# EAGLE board 00A-81-A1-01 (EAGLE 6.3), part 1 of 2
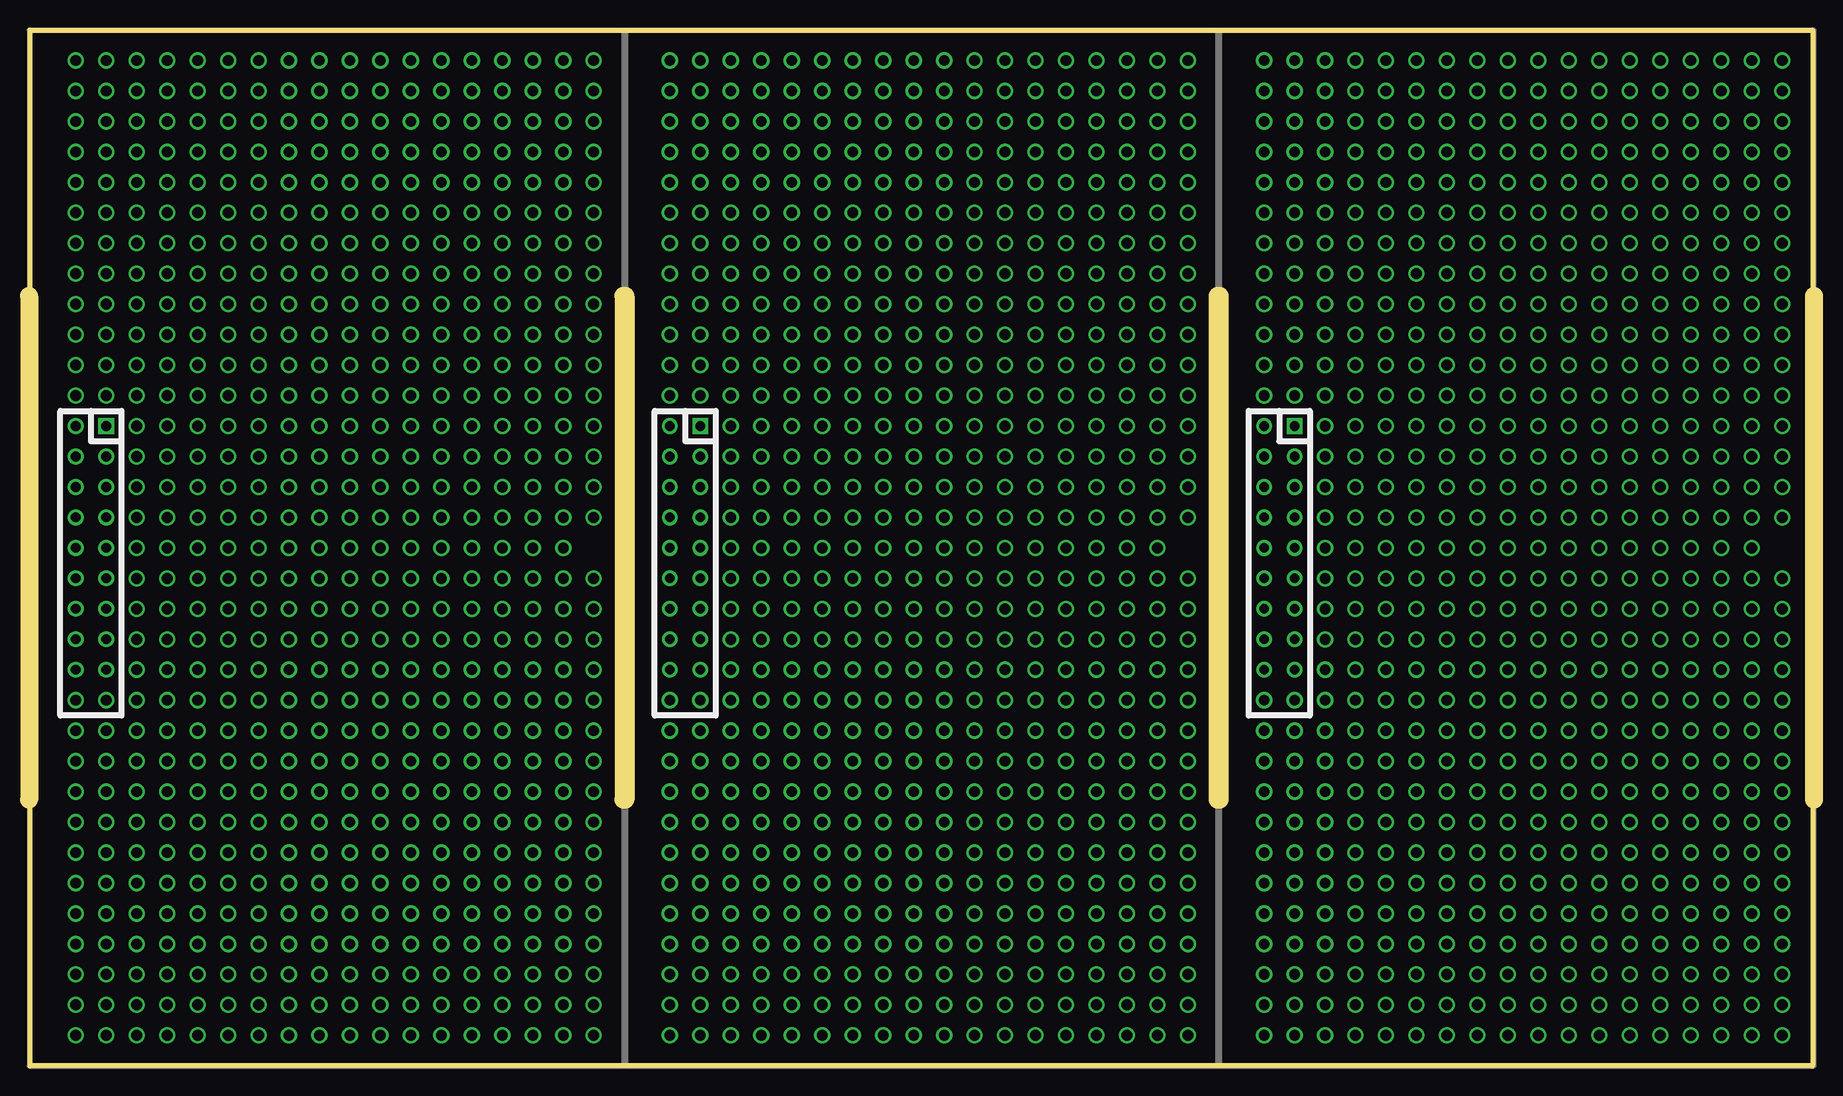
[diagram p0: board, top side]

Size 148.59 x 86.36 mm. Coordinates in mm from the lower left corner, seen from the top.
Outline: 0,86.36 148.59,86.36 148.59,0 0,0 0,86.36
Copper layers (1*16): Top 0.035mm / dielectric 1.5mm / Bottom 0.035mm
Design rules "default": minimum track width 10mil, minimum drill 0.6mm, track to track 8mil, track to pad 8mil, pad to pad 8mil, via to via 8mil, smd to smd 8mil, copper to edge 40mil, drill to drill 8mil, minimum pad ring 10mil, minimum via ring 8mil, stop-mask expansion 4mil, vias tented up to drill 0mil, thermal gap 10mil

## Footprints (pad centres in the part's own frame; a part is rotated, then mirrored left to right if it is on the bottom)
BC_HOUSING_53MM = drill 0.8 square: 1 6.42,10.16 | drill 0.8: 2 3.88,10.16; 3 6.42,7.62; 4 3.88,7.62; 5 6.42,5.08; 6 3.88,5.08; 7 6.42,2.54; 8 3.88,2.54; 9 6.42,0; 10 3.88,0; 11 6.42,-2.54; 12 3.88,-2.54; 13 6.42,-5.08; 14 3.88,-5.08; 15A 6.42,-7.62; 15B 3.88,-7.62; 16A 6.42,-10.16; 16B 3.88,-10.16

## Placement (x,y rotation side)
E$1  [IMAGE_GERBER_FRAME]  -21.59,-60.96 0 top  (outside the outline)
J1  [BC_HOUSING_53MM]  -0.07,43.18 0 top
J2  [BC_HOUSING_53MM]  49.46,43.18 0 top
J3  [BC_HOUSING_53MM]  98.99,43.18 0 top

## Library data of the parts
E$1 = miniPCB_ENGDWG; DWG_NO: 00A-81; REV: A1-01
J1-J3 = miniPCB_BOARDS

## Tracks (layer width: path | path; a pad name or v marks a point on that pad's centre or on a via)
N$1  (via drill 0.9)
  other vias: 3.81,55.88
N$2  (via drill 0.9)
  other vias: 6.35,55.88
N$3  (via drill 0.9)
  other vias: 6.35,58.42
N$4  (via drill 0.9)
  other vias: 3.81,58.42
N$5  (via drill 0.9)
  other vias: 3.81,60.96
N$6  (via drill 0.9)
  other vias: 6.35,60.96
N$7  (via drill 0.9)
  other vias: 3.81,63.5
N$8  (via drill 0.9)
  other vias: 6.35,63.5
N$9  (via drill 0.9)
  other vias: 3.81,66.04
N$10  (via drill 0.9)
  other vias: 6.35,66.04
N$11  (via drill 0.9)
  other vias: 3.81,68.58
N$12  (via drill 0.9)
  other vias: 6.35,68.58
N$13  (via drill 0.9)
  other vias: 3.81,71.12
N$14  (via drill 0.9)
  other vias: 6.35,71.12
N$15  (via drill 0.9)
  other vias: 3.81,73.66
N$16  (via drill 0.9)
  other vias: 6.35,73.66
N$17  (via drill 0.9)
  other vias: 3.81,76.2
N$18  (via drill 0.9)
  other vias: 6.35,76.2
N$19  (via drill 0.9)
  other vias: 3.81,78.74
N$20  (via drill 0.9)
  other vias: 6.35,78.74
N$21  (via drill 0.9)
  other vias: 3.81,81.28
N$22  (via drill 0.9)
  other vias: 6.35,81.28
N$23  (via drill 0.9)
  other vias: 3.81,83.82
N$24  (via drill 0.9)
  other vias: 6.35,83.82
N$25  (via drill 0.9)
  other vias: 3.81,2.54
N$26  (via drill 0.9)
  other vias: 6.35,2.54
N$27  (via drill 0.9)
  other vias: 6.35,5.08
N$28  (via drill 0.9)
  other vias: 3.81,5.08
N$29  (via drill 0.9)
  other vias: 3.81,7.62
N$30  (via drill 0.9)
  other vias: 6.35,7.62
N$31  (via drill 0.9)
  other vias: 3.81,10.16
N$32  (via drill 0.9)
  other vias: 6.35,10.16
N$33  (via drill 0.9)
  other vias: 3.81,12.7
N$34  (via drill 0.9)
  other vias: 6.35,12.7
N$35  (via drill 0.9)
  other vias: 3.81,15.24
N$36  (via drill 0.9)
  other vias: 6.35,15.24
N$37  (via drill 0.9)
  other vias: 3.81,17.78
N$38  (via drill 0.9)
  other vias: 6.35,17.78
N$39  (via drill 0.9)
  other vias: 3.81,20.32
N$40  (via drill 0.9)
  other vias: 6.35,20.32
N$41  (via drill 0.9)
  other vias: 3.81,22.86
N$42  (via drill 0.9)
  other vias: 6.35,22.86
N$43  (via drill 0.9)
  other vias: 3.81,25.4
N$44  (via drill 0.9)
  other vias: 6.35,25.4
N$45  (via drill 0.9)
  other vias: 3.81,27.94
N$46  (via drill 0.9)
  other vias: 6.35,27.94
N$47  (via drill 0.9)
  other vias: 3.81,30.48
N$48  (via drill 0.9)
  other vias: 6.35,30.48
N$49  (via drill 0.9)
  other vias: 8.89,55.88
N$50  (via drill 0.9)
  other vias: 11.43,55.88
N$51  (via drill 0.9)
  other vias: 11.43,58.42
N$52  (via drill 0.9)
  other vias: 8.89,58.42
N$53  (via drill 0.9)
  other vias: 8.89,60.96
N$54  (via drill 0.9)
  other vias: 11.43,60.96
N$55  (via drill 0.9)
  other vias: 8.89,63.5
N$56  (via drill 0.9)
  other vias: 11.43,63.5
N$57  (via drill 0.9)
  other vias: 8.89,66.04
N$58  (via drill 0.9)
  other vias: 11.43,66.04
N$59  (via drill 0.9)
  other vias: 8.89,68.58
N$60  (via drill 0.9)
  other vias: 11.43,68.58
N$61  (via drill 0.9)
  other vias: 8.89,71.12
N$62  (via drill 0.9)
  other vias: 11.43,71.12
N$63  (via drill 0.9)
  other vias: 8.89,73.66
N$64  (via drill 0.9)
  other vias: 11.43,73.66
N$65  (via drill 0.9)
  other vias: 8.89,76.2
N$66  (via drill 0.9)
  other vias: 11.43,76.2
N$67  (via drill 0.9)
  other vias: 8.89,78.74
N$68  (via drill 0.9)
  other vias: 11.43,78.74
N$69  (via drill 0.9)
  other vias: 8.89,81.28
N$70  (via drill 0.9)
  other vias: 11.43,81.28
N$71  (via drill 0.9)
  other vias: 8.89,83.82
N$72  (via drill 0.9)
  other vias: 11.43,83.82
N$73  (via drill 0.9)
  other vias: 8.89,25.4
N$74  (via drill 0.9)
  other vias: 11.43,25.4
N$75  (via drill 0.9)
  other vias: 11.43,27.94
N$76  (via drill 0.9)
  other vias: 8.89,27.94
N$77  (via drill 0.9)
  other vias: 8.89,30.48
N$78  (via drill 0.9)
  other vias: 11.43,30.48
N$79  (via drill 0.9)
  other vias: 8.89,33.02
N$80  (via drill 0.9)
  other vias: 11.43,33.02
N$81  (via drill 0.9)
  other vias: 8.89,35.56
N$82  (via drill 0.9)
  other vias: 11.43,35.56
N$83  (via drill 0.9)
  other vias: 8.89,38.1
N$84  (via drill 0.9)
  other vias: 11.43,38.1
N$85  (via drill 0.9)
  other vias: 8.89,40.64
N$86  (via drill 0.9)
  other vias: 11.43,40.64
N$87  (via drill 0.9)
  other vias: 8.89,43.18
N$88  (via drill 0.9)
  other vias: 11.43,43.18
N$89  (via drill 0.9)
  other vias: 8.89,45.72
N$90  (via drill 0.9)
  other vias: 11.43,45.72
N$91  (via drill 0.9)
  other vias: 8.89,48.26
N$92  (via drill 0.9)
  other vias: 11.43,48.26
N$93  (via drill 0.9)
  other vias: 8.89,50.8
N$94  (via drill 0.9)
  other vias: 11.43,50.8
N$95  (via drill 0.9)
  other vias: 8.89,53.34
N$96  (via drill 0.9)
  other vias: 11.43,53.34
N$97  (via drill 0.9)
  other vias: 53.34,55.88
N$98  (via drill 0.9)
  other vias: 55.88,55.88
N$99  (via drill 0.9)
  other vias: 55.88,58.42
N$100  (via drill 0.9)
  other vias: 53.34,58.42
N$101  (via drill 0.9)
  other vias: 53.34,60.96
N$102  (via drill 0.9)
  other vias: 55.88,60.96
N$103  (via drill 0.9)
  other vias: 8.89,2.54
N$104  (via drill 0.9)
  other vias: 11.43,2.54
N$105  (via drill 0.9)
  other vias: 8.89,5.08
N$106  (via drill 0.9)
  other vias: 11.43,5.08
N$107  (via drill 0.9)
  other vias: 8.89,7.62
N$108  (via drill 0.9)
  other vias: 11.43,7.62
N$109  (via drill 0.9)
  other vias: 8.89,10.16
N$110  (via drill 0.9)
  other vias: 11.43,10.16
N$111  (via drill 0.9)
  other vias: 8.89,12.7
N$112  (via drill 0.9)
  other vias: 11.43,12.7
N$113  (via drill 0.9)
  other vias: 8.89,15.24
N$114  (via drill 0.9)
  other vias: 11.43,15.24
N$115  (via drill 0.9)
  other vias: 8.89,17.78
N$116  (via drill 0.9)
  other vias: 11.43,17.78
N$117  (via drill 0.9)
  other vias: 8.89,20.32
N$118  (via drill 0.9)
  other vias: 11.43,20.32
N$119  (via drill 0.9)
  other vias: 8.89,22.86
N$120  (via drill 0.9)
  other vias: 11.43,22.86
N$121  (via drill 0.9)
  other vias: 13.97,55.88
N$122  (via drill 0.9)
  other vias: 16.51,55.88
N$123  (via drill 0.9)
  other vias: 16.51,58.42
N$124  (via drill 0.9)
  other vias: 13.97,58.42
N$125  (via drill 0.9)
  other vias: 13.97,60.96
N$126  (via drill 0.9)
  other vias: 16.51,60.96
N$127  (via drill 0.9)
  other vias: 13.97,63.5
N$128  (via drill 0.9)
  other vias: 16.51,63.5
N$129  (via drill 0.9)
  other vias: 13.97,66.04
N$130  (via drill 0.9)
  other vias: 16.51,66.04
N$131  (via drill 0.9)
  other vias: 13.97,68.58
N$132  (via drill 0.9)
  other vias: 16.51,68.58
N$133  (via drill 0.9)
  other vias: 13.97,71.12
N$134  (via drill 0.9)
  other vias: 16.51,71.12
N$135  (via drill 0.9)
  other vias: 13.97,73.66
N$136  (via drill 0.9)
  other vias: 16.51,73.66
N$137  (via drill 0.9)
  other vias: 13.97,76.2
N$138  (via drill 0.9)
  other vias: 16.51,76.2
N$139  (via drill 0.9)
  other vias: 13.97,78.74
N$140  (via drill 0.9)
  other vias: 16.51,78.74
N$141  (via drill 0.9)
  other vias: 13.97,81.28
N$142  (via drill 0.9)
  other vias: 16.51,81.28
N$143  (via drill 0.9)
  other vias: 13.97,83.82
N$144  (via drill 0.9)
  other vias: 16.51,83.82
N$145  (via drill 0.9)
  other vias: 13.97,25.4
N$146  (via drill 0.9)
  other vias: 16.51,25.4
N$147  (via drill 0.9)
  other vias: 16.51,27.94
N$148  (via drill 0.9)
  other vias: 13.97,27.94
N$149  (via drill 0.9)
  other vias: 13.97,30.48
N$150  (via drill 0.9)
  other vias: 16.51,30.48
N$151  (via drill 0.9)
  other vias: 13.97,33.02
N$152  (via drill 0.9)
  other vias: 16.51,33.02
N$153  (via drill 0.9)
  other vias: 13.97,35.56
N$154  (via drill 0.9)
  other vias: 16.51,35.56
N$155  (via drill 0.9)
  other vias: 13.97,38.1
N$156  (via drill 0.9)
  other vias: 16.51,38.1
N$157  (via drill 0.9)
  other vias: 13.97,40.64
N$158  (via drill 0.9)
  other vias: 16.51,40.64
N$159  (via drill 0.9)
  other vias: 13.97,43.18
N$160  (via drill 0.9)
  other vias: 16.51,43.18
N$161  (via drill 0.9)
  other vias: 13.97,45.72
N$162  (via drill 0.9)
  other vias: 16.51,45.72
N$163  (via drill 0.9)
  other vias: 13.97,48.26
N$164  (via drill 0.9)
  other vias: 16.51,48.26
N$165  (via drill 0.9)
  other vias: 13.97,50.8
N$166  (via drill 0.9)
  other vias: 16.51,50.8
N$167  (via drill 0.9)
  other vias: 13.97,53.34
N$168  (via drill 0.9)
  other vias: 16.51,53.34
N$169  (via drill 0.9)
  other vias: 13.97,2.54
N$170  (via drill 0.9)
  other vias: 16.51,2.54
N$171  (via drill 0.9)
  other vias: 13.97,5.08
N$172  (via drill 0.9)
  other vias: 16.51,5.08
N$173  (via drill 0.9)
  other vias: 13.97,7.62
N$174  (via drill 0.9)
  other vias: 16.51,7.62
N$175  (via drill 0.9)
  other vias: 13.97,10.16
N$176  (via drill 0.9)
  other vias: 16.51,10.16
N$177  (via drill 0.9)
  other vias: 13.97,12.7
N$178  (via drill 0.9)
  other vias: 16.51,12.7
N$179  (via drill 0.9)
  other vias: 13.97,15.24
N$180  (via drill 0.9)
  other vias: 16.51,15.24
N$181  (via drill 0.9)
  other vias: 13.97,17.78
N$182  (via drill 0.9)
  other vias: 16.51,17.78
N$183  (via drill 0.9)
  other vias: 13.97,20.32
N$184  (via drill 0.9)
  other vias: 16.51,20.32
N$185  (via drill 0.9)
  other vias: 13.97,22.86
N$186  (via drill 0.9)
  other vias: 16.51,22.86
N$187  (via drill 0.9)
  other vias: 19.05,55.88
N$188  (via drill 0.9)
  other vias: 21.59,55.88
N$189  (via drill 0.9)
  other vias: 21.59,58.42
N$190  (via drill 0.9)
  other vias: 19.05,58.42
N$191  (via drill 0.9)
  other vias: 19.05,60.96
N$192  (via drill 0.9)
  other vias: 21.59,60.96
N$193  (via drill 0.9)
  other vias: 19.05,63.5
N$194  (via drill 0.9)
  other vias: 21.59,63.5
N$195  (via drill 0.9)
  other vias: 19.05,66.04
N$196  (via drill 0.9)
  other vias: 21.59,66.04
N$197  (via drill 0.9)
  other vias: 19.05,68.58
N$198  (via drill 0.9)
  other vias: 21.59,68.58
N$199  (via drill 0.9)
  other vias: 19.05,71.12
N$200  (via drill 0.9)
  other vias: 21.59,71.12
N$201  (via drill 0.9)
  other vias: 19.05,73.66
N$202  (via drill 0.9)
  other vias: 21.59,73.66
N$203  (via drill 0.9)
  other vias: 19.05,76.2
N$204  (via drill 0.9)
  other vias: 21.59,76.2
N$205  (via drill 0.9)
  other vias: 19.05,78.74
N$206  (via drill 0.9)
  other vias: 21.59,78.74
N$207  (via drill 0.9)
  other vias: 19.05,81.28
N$208  (via drill 0.9)
  other vias: 21.59,81.28
N$209  (via drill 0.9)
  other vias: 19.05,83.82
N$210  (via drill 0.9)
  other vias: 21.59,83.82
N$211  (via drill 0.9)
  other vias: 19.05,25.4
N$212  (via drill 0.9)
  other vias: 21.59,25.4
N$213  (via drill 0.9)
  other vias: 21.59,27.94
N$214  (via drill 0.9)
  other vias: 19.05,27.94
N$215  (via drill 0.9)
  other vias: 19.05,30.48
N$216  (via drill 0.9)
  other vias: 21.59,30.48
N$217  (via drill 0.9)
  other vias: 19.05,33.02
N$218  (via drill 0.9)
  other vias: 21.59,33.02
N$219  (via drill 0.9)
  other vias: 19.05,35.56
N$220  (via drill 0.9)
  other vias: 21.59,35.56
N$221  (via drill 0.9)
  other vias: 19.05,38.1
N$222  (via drill 0.9)
  other vias: 21.59,38.1
N$223  (via drill 0.9)
  other vias: 19.05,40.64
N$224  (via drill 0.9)
  other vias: 21.59,40.64
N$225  (via drill 0.9)
  other vias: 19.05,43.18
N$226  (via drill 0.9)
  other vias: 21.59,43.18
N$227  (via drill 0.9)
  other vias: 19.05,45.72
N$228  (via drill 0.9)
  other vias: 21.59,45.72
N$229  (via drill 0.9)
  other vias: 19.05,48.26
N$230  (via drill 0.9)
  other vias: 21.59,48.26
N$231  (via drill 0.9)
  other vias: 19.05,50.8
N$232  (via drill 0.9)
  other vias: 21.59,50.8
N$233  (via drill 0.9)
  other vias: 19.05,53.34
N$234  (via drill 0.9)
  other vias: 21.59,53.34
N$235  (via drill 0.9)
  other vias: 19.05,2.54
N$236  (via drill 0.9)
  other vias: 21.59,2.54
N$237  (via drill 0.9)
  other vias: 19.05,5.08
N$238  (via drill 0.9)
  other vias: 21.59,5.08
N$239  (via drill 0.9)
  other vias: 19.05,7.62
N$240  (via drill 0.9)
  other vias: 21.59,7.62
N$241  (via drill 0.9)
  other vias: 19.05,10.16
N$242  (via drill 0.9)
  other vias: 21.59,10.16
N$243  (via drill 0.9)
  other vias: 19.05,12.7
N$244  (via drill 0.9)
  other vias: 21.59,12.7
N$245  (via drill 0.9)
  other vias: 19.05,15.24
N$246  (via drill 0.9)
  other vias: 21.59,15.24
N$247  (via drill 0.9)
  other vias: 19.05,17.78
N$248  (via drill 0.9)
  other vias: 21.59,17.78
N$249  (via drill 0.9)
  other vias: 19.05,20.32
N$250  (via drill 0.9)
  other vias: 21.59,20.32
N$251  (via drill 0.9)
  other vias: 19.05,22.86
N$252  (via drill 0.9)
  other vias: 21.59,22.86
N$253  (via drill 0.9)
  other vias: 24.13,55.88
N$254  (via drill 0.9)
  other vias: 26.67,55.88
N$255  (via drill 0.9)
  other vias: 26.67,58.42
N$256  (via drill 0.9)
  other vias: 24.13,58.42
N$257  (via drill 0.9)
  other vias: 24.13,60.96
N$258  (via drill 0.9)
  other vias: 26.67,60.96
N$259  (via drill 0.9)
  other vias: 24.13,63.5
N$260  (via drill 0.9)
  other vias: 26.67,63.5
N$261  (via drill 0.9)
  other vias: 24.13,66.04
N$262  (via drill 0.9)
  other vias: 26.67,66.04
N$263  (via drill 0.9)
  other vias: 24.13,68.58
N$264  (via drill 0.9)
  other vias: 26.67,68.58
N$265  (via drill 0.9)
  other vias: 24.13,71.12
N$266  (via drill 0.9)
  other vias: 26.67,71.12
N$267  (via drill 0.9)
  other vias: 24.13,73.66
N$268  (via drill 0.9)
  other vias: 26.67,73.66
N$269  (via drill 0.9)
  other vias: 24.13,76.2
N$270  (via drill 0.9)
  other vias: 26.67,76.2
N$271  (via drill 0.9)
  other vias: 24.13,78.74
N$272  (via drill 0.9)
  other vias: 26.67,78.74
N$273  (via drill 0.9)
  other vias: 24.13,81.28
N$274  (via drill 0.9)
  other vias: 26.67,81.28
N$275  (via drill 0.9)
  other vias: 24.13,83.82
N$276  (via drill 0.9)
  other vias: 26.67,83.82
N$277  (via drill 0.9)
  other vias: 24.13,25.4
N$278  (via drill 0.9)
  other vias: 26.67,25.4
N$279  (via drill 0.9)
  other vias: 26.67,27.94
N$280  (via drill 0.9)
  other vias: 24.13,27.94
N$281  (via drill 0.9)
  other vias: 24.13,30.48
N$282  (via drill 0.9)
  other vias: 26.67,30.48
N$283  (via drill 0.9)
  other vias: 24.13,33.02
N$284  (via drill 0.9)
  other vias: 26.67,33.02
N$285  (via drill 0.9)
  other vias: 24.13,35.56
N$286  (via drill 0.9)
  other vias: 26.67,35.56
N$287  (via drill 0.9)
  other vias: 24.13,38.1
N$288  (via drill 0.9)
  other vias: 26.67,38.1
N$289  (via drill 0.9)
  other vias: 24.13,40.64
N$290  (via drill 0.9)
  other vias: 26.67,40.64
N$291  (via drill 0.9)
  other vias: 24.13,43.18
N$292  (via drill 0.9)
  other vias: 26.67,43.18
N$293  (via drill 0.9)
  other vias: 24.13,45.72
N$294  (via drill 0.9)
  other vias: 26.67,45.72
N$295  (via drill 0.9)
  other vias: 24.13,48.26
N$296  (via drill 0.9)
  other vias: 26.67,48.26
N$297  (via drill 0.9)
  other vias: 24.13,50.8
N$298  (via drill 0.9)
  other vias: 26.67,50.8
N$299  (via drill 0.9)
  other vias: 24.13,53.34
N$300  (via drill 0.9)
  other vias: 26.67,53.34
N$301  (via drill 0.9)
  other vias: 24.13,2.54
N$302  (via drill 0.9)
  other vias: 26.67,2.54
N$303  (via drill 0.9)
  other vias: 24.13,5.08
N$304  (via drill 0.9)
  other vias: 26.67,5.08
N$305  (via drill 0.9)
  other vias: 24.13,7.62
N$306  (via drill 0.9)
  other vias: 26.67,7.62
N$307  (via drill 0.9)
  other vias: 24.13,10.16
N$308  (via drill 0.9)
  other vias: 26.67,10.16
N$309  (via drill 0.9)
  other vias: 24.13,12.7
N$310  (via drill 0.9)
  other vias: 26.67,12.7
N$311  (via drill 0.9)
  other vias: 24.13,15.24
N$312  (via drill 0.9)
  other vias: 26.67,15.24
N$313  (via drill 0.9)
  other vias: 24.13,17.78
N$314  (via drill 0.9)
  other vias: 26.67,17.78
N$315  (via drill 0.9)
  other vias: 24.13,20.32
N$316  (via drill 0.9)
  other vias: 26.67,20.32
N$317  (via drill 0.9)
  other vias: 24.13,22.86
N$318  (via drill 0.9)
  other vias: 26.67,22.86
N$319  (via drill 0.9)
  other vias: 29.21,55.88
N$320  (via drill 0.9)
  other vias: 31.75,55.88
N$321  (via drill 0.9)
  other vias: 31.75,58.42
N$322  (via drill 0.9)
  other vias: 29.21,58.42
N$323  (via drill 0.9)
  other vias: 29.21,60.96
N$324  (via drill 0.9)
  other vias: 31.75,60.96
N$325  (via drill 0.9)
  other vias: 29.21,63.5
N$326  (via drill 0.9)
  other vias: 31.75,63.5
N$327  (via drill 0.9)
  other vias: 29.21,66.04
N$328  (via drill 0.9)
  other vias: 31.75,66.04
N$329  (via drill 0.9)
  other vias: 29.21,68.58
N$330  (via drill 0.9)
  other vias: 31.75,68.58
N$331  (via drill 0.9)
  other vias: 29.21,71.12
N$332  (via drill 0.9)
  other vias: 31.75,71.12
N$333  (via drill 0.9)
  other vias: 29.21,73.66
N$334  (via drill 0.9)
  other vias: 31.75,73.66
N$335  (via drill 0.9)
  other vias: 29.21,76.2
N$336  (via drill 0.9)
  other vias: 31.75,76.2
N$337  (via drill 0.9)
  other vias: 29.21,78.74
N$338  (via drill 0.9)
  other vias: 31.75,78.74
N$339  (via drill 0.9)
  other vias: 29.21,81.28
N$340  (via drill 0.9)
  other vias: 31.75,81.28
N$341  (via drill 0.9)
  other vias: 29.21,83.82
N$342  (via drill 0.9)
  other vias: 31.75,83.82
N$343  (via drill 0.9)
  other vias: 29.21,25.4
N$344  (via drill 0.9)
  other vias: 31.75,25.4
N$345  (via drill 0.9)
  other vias: 31.75,27.94
N$346  (via drill 0.9)
  other vias: 29.21,27.94
N$347  (via drill 0.9)
  other vias: 29.21,30.48
N$348  (via drill 0.9)
  other vias: 31.75,30.48
N$349  (via drill 0.9)
  other vias: 29.21,33.02
N$350  (via drill 0.9)
  other vias: 31.75,33.02
N$351  (via drill 0.9)
  other vias: 29.21,35.56
N$352  (via drill 0.9)
  other vias: 31.75,35.56
N$353  (via drill 0.9)
  other vias: 29.21,38.1
N$354  (via drill 0.9)
  other vias: 31.75,38.1
N$355  (via drill 0.9)
  other vias: 29.21,40.64
N$356  (via drill 0.9)
  other vias: 31.75,40.64
N$357  (via drill 0.9)
  other vias: 29.21,43.18
N$358  (via drill 0.9)
  other vias: 31.75,43.18
N$359  (via drill 0.9)
  other vias: 29.21,45.72
N$360  (via drill 0.9)
  other vias: 31.75,45.72
N$361  (via drill 0.9)
  other vias: 29.21,48.26
N$362  (via drill 0.9)
  other vias: 31.75,48.26
N$363  (via drill 0.9)
  other vias: 29.21,50.8
N$364  (via drill 0.9)
  other vias: 31.75,50.8
N$365  (via drill 0.9)
  other vias: 29.21,53.34
N$366  (via drill 0.9)
  other vias: 31.75,53.34
N$367  (via drill 0.9)
  other vias: 29.21,2.54
N$368  (via drill 0.9)
  other vias: 31.75,2.54
N$369  (via drill 0.9)
  other vias: 29.21,5.08
N$370  (via drill 0.9)
  other vias: 31.75,5.08
N$371  (via drill 0.9)
  other vias: 29.21,7.62
N$372  (via drill 0.9)
  other vias: 31.75,7.62
N$373  (via drill 0.9)
  other vias: 29.21,10.16
N$374  (via drill 0.9)
  other vias: 31.75,10.16
N$375  (via drill 0.9)
  other vias: 29.21,12.7
N$376  (via drill 0.9)
  other vias: 31.75,12.7
N$377  (via drill 0.9)
  other vias: 29.21,15.24
N$378  (via drill 0.9)
  other vias: 31.75,15.24
N$379  (via drill 0.9)
  other vias: 29.21,17.78
N$380  (via drill 0.9)
  other vias: 31.75,17.78
N$381  (via drill 0.9)
  other vias: 29.21,20.32
N$382  (via drill 0.9)
  other vias: 31.75,20.32
N$383  (via drill 0.9)
  other vias: 29.21,22.86
N$384  (via drill 0.9)
  other vias: 31.75,22.86
N$385  (via drill 0.9)
  other vias: 34.29,55.88
N$386  (via drill 0.9)
  other vias: 36.83,55.88
N$387  (via drill 0.9)
  other vias: 36.83,58.42
N$388  (via drill 0.9)
  other vias: 34.29,58.42
N$389  (via drill 0.9)
  other vias: 34.29,60.96
N$390  (via drill 0.9)
  other vias: 36.83,60.96
N$391  (via drill 0.9)
  other vias: 34.29,63.5
N$392  (via drill 0.9)
  other vias: 36.83,63.5
N$393  (via drill 0.9)
  other vias: 34.29,66.04
N$394  (via drill 0.9)
  other vias: 36.83,66.04
N$395  (via drill 0.9)
  other vias: 34.29,68.58
N$396  (via drill 0.9)
  other vias: 36.83,68.58
N$397  (via drill 0.9)
  other vias: 34.29,71.12
N$398  (via drill 0.9)
  other vias: 36.83,71.12
N$399  (via drill 0.9)
  other vias: 34.29,73.66
N$400  (via drill 0.9)
  other vias: 36.83,73.66
N$401  (via drill 0.9)
  other vias: 34.29,76.2
N$402  (via drill 0.9)
  other vias: 36.83,76.2
N$403  (via drill 0.9)
  other vias: 34.29,78.74
N$404  (via drill 0.9)
  other vias: 36.83,78.74
N$405  (via drill 0.9)
  other vias: 34.29,81.28
N$406  (via drill 0.9)
  other vias: 36.83,81.28
N$407  (via drill 0.9)
  other vias: 34.29,83.82
N$408  (via drill 0.9)
  other vias: 36.83,83.82
N$409  (via drill 0.9)
  other vias: 34.29,25.4
N$410  (via drill 0.9)
  other vias: 36.83,25.4
N$411  (via drill 0.9)
  other vias: 36.83,27.94
N$412  (via drill 0.9)
  other vias: 34.29,27.94
N$413  (via drill 0.9)
  other vias: 34.29,30.48
N$414  (via drill 0.9)
  other vias: 36.83,30.48
N$415  (via drill 0.9)
  other vias: 34.29,33.02
N$416  (via drill 0.9)
  other vias: 36.83,33.02
N$417  (via drill 0.9)
  other vias: 34.29,35.56
N$418  (via drill 0.9)
  other vias: 36.83,35.56
N$419  (via drill 0.9)
  other vias: 34.29,38.1
N$420  (via drill 0.9)
  other vias: 36.83,38.1
N$421  (via drill 0.9)
  other vias: 34.29,40.64
N$422  (via drill 0.9)
  other vias: 36.83,40.64
N$423  (via drill 0.9)
  other vias: 34.29,43.18
N$424  (via drill 0.9)
  other vias: 36.83,43.18
N$425  (via drill 0.9)
  other vias: 34.29,45.72
N$426  (via drill 0.9)
  other vias: 36.83,45.72
N$427  (via drill 0.9)
  other vias: 34.29,48.26
N$428  (via drill 0.9)
  other vias: 36.83,48.26
N$429  (via drill 0.9)
  other vias: 34.29,50.8
N$430  (via drill 0.9)
  other vias: 36.83,50.8
N$431  (via drill 0.9)
  other vias: 34.29,53.34
N$432  (via drill 0.9)
  other vias: 36.83,53.34
N$433  (via drill 0.9)
  other vias: 34.29,2.54
N$434  (via drill 0.9)
  other vias: 36.83,2.54
N$435  (via drill 0.9)
  other vias: 34.29,5.08
N$436  (via drill 0.9)
  other vias: 36.83,5.08
N$437  (via drill 0.9)
  other vias: 34.29,7.62
N$438  (via drill 0.9)
  other vias: 36.83,7.62
N$439  (via drill 0.9)
  other vias: 34.29,10.16
N$440  (via drill 0.9)
  other vias: 36.83,10.16
N$441  (via drill 0.9)
  other vias: 34.29,12.7
N$442  (via drill 0.9)
  other vias: 36.83,12.7
N$443  (via drill 0.9)
  other vias: 34.29,15.24
N$444  (via drill 0.9)
  other vias: 36.83,15.24
N$445  (via drill 0.9)
  other vias: 34.29,17.78
N$446  (via drill 0.9)
  other vias: 36.83,17.78
N$447  (via drill 0.9)
  other vias: 34.29,20.32
N$448  (via drill 0.9)
  other vias: 36.83,20.32
N$449  (via drill 0.9)
  other vias: 34.29,22.86
N$450  (via drill 0.9)
  other vias: 36.83,22.86
N$451  (via drill 0.9)
  other vias: 39.37,55.88
N$452  (via drill 0.9)
  other vias: 41.91,55.88
N$453  (via drill 0.9)
  other vias: 41.91,58.42
N$454  (via drill 0.9)
  other vias: 39.37,58.42
N$455  (via drill 0.9)
  other vias: 39.37,60.96
N$456  (via drill 0.9)
  other vias: 41.91,60.96
N$457  (via drill 0.9)
  other vias: 39.37,63.5
N$458  (via drill 0.9)
  other vias: 41.91,63.5
N$459  (via drill 0.9)
  other vias: 39.37,66.04
N$460  (via drill 0.9)
  other vias: 41.91,66.04
N$461  (via drill 0.9)
  other vias: 39.37,68.58
N$462  (via drill 0.9)
  other vias: 41.91,68.58
N$463  (via drill 0.9)
  other vias: 39.37,71.12
N$464  (via drill 0.9)
  other vias: 41.91,71.12
N$465  (via drill 0.9)
  other vias: 39.37,73.66
N$466  (via drill 0.9)
  other vias: 41.91,73.66
N$467  (via drill 0.9)
  other vias: 39.37,76.2
N$468  (via drill 0.9)
  other vias: 41.91,76.2
N$469  (via drill 0.9)
  other vias: 39.37,78.74
N$470  (via drill 0.9)
  other vias: 41.91,78.74
N$471  (via drill 0.9)
  other vias: 39.37,81.28
N$472  (via drill 0.9)
  other vias: 41.91,81.28
N$473  (via drill 0.9)
  other vias: 39.37,83.82
N$474  (via drill 0.9)
  other vias: 41.91,83.82
N$475  (via drill 0.9)
  other vias: 39.37,25.4
N$476  (via drill 0.9)
  other vias: 41.91,25.4
N$477  (via drill 0.9)
  other vias: 41.91,27.94
N$478  (via drill 0.9)
  other vias: 39.37,27.94
N$479  (via drill 0.9)
  other vias: 39.37,30.48
N$480  (via drill 0.9)
  other vias: 41.91,30.48
N$481  (via drill 0.9)
  other vias: 39.37,33.02
N$482  (via drill 0.9)
  other vias: 41.91,33.02
N$483  (via drill 0.9)
  other vias: 39.37,35.56
N$484  (via drill 0.9)
  other vias: 41.91,35.56
N$485  (via drill 0.9)
  other vias: 39.37,38.1
N$486  (via drill 0.9)
  other vias: 41.91,38.1
N$487  (via drill 0.9)
  other vias: 39.37,40.64
N$488  (via drill 0.9)
  other vias: 41.91,40.64
N$489  (via drill 0.9)
  other vias: 39.37,43.18
N$490  (via drill 0.9)
  other vias: 41.91,43.18
N$491  (via drill 0.9)
  other vias: 39.37,45.72
N$492  (via drill 0.9)
  other vias: 41.91,45.72
N$493  (via drill 0.9)
  other vias: 39.37,48.26
N$494  (via drill 0.9)
  other vias: 41.91,48.26
N$495  (via drill 0.9)
  other vias: 39.37,50.8
N$496  (via drill 0.9)
  other vias: 41.91,50.8
N$497  (via drill 0.9)
  other vias: 39.37,53.34
N$498  (via drill 0.9)
  other vias: 41.91,53.34
N$499  (via drill 0.9)
  other vias: 39.37,2.54
N$500  (via drill 0.9)
  other vias: 41.91,2.54
N$501  (via drill 0.9)
  other vias: 39.37,5.08
N$502  (via drill 0.9)
  other vias: 41.91,5.08
N$503  (via drill 0.9)
  other vias: 39.37,7.62
N$504  (via drill 0.9)
  other vias: 41.91,7.62
N$505  (via drill 0.9)
  other vias: 39.37,10.16
N$506  (via drill 0.9)
  other vias: 41.91,10.16
N$507  (via drill 0.9)
  other vias: 39.37,12.7
N$508  (via drill 0.9)
  other vias: 41.91,12.7
N$509  (via drill 0.9)
  other vias: 39.37,15.24
N$510  (via drill 0.9)
  other vias: 41.91,15.24
N$511  (via drill 0.9)
  other vias: 39.37,17.78
N$512  (via drill 0.9)
  other vias: 41.91,17.78
N$513  (via drill 0.9)
  other vias: 39.37,20.32
N$514  (via drill 0.9)
  other vias: 41.91,20.32
N$515  (via drill 0.9)
  other vias: 39.37,22.86
N$516  (via drill 0.9)
  other vias: 41.91,22.86
N$517  (via drill 0.9)
  other vias: 44.45,55.88
N$518  (via drill 0.9)
  other vias: 46.99,55.88
N$519  (via drill 0.9)
  other vias: 46.99,58.42
N$520  (via drill 0.9)
  other vias: 44.45,58.42
N$521  (via drill 0.9)
  other vias: 44.45,60.96
N$522  (via drill 0.9)
  other vias: 46.99,60.96
N$523  (via drill 0.9)
  other vias: 44.45,63.5
N$524  (via drill 0.9)
  other vias: 46.99,63.5
N$525  (via drill 0.9)
  other vias: 44.45,66.04
N$526  (via drill 0.9)
  other vias: 46.99,66.04
N$527  (via drill 0.9)
  other vias: 44.45,68.58
N$528  (via drill 0.9)
  other vias: 46.99,68.58
N$529  (via drill 0.9)
  other vias: 44.45,71.12
N$530  (via drill 0.9)
  other vias: 46.99,71.12
N$531  (via drill 0.9)
  other vias: 44.45,73.66
N$532  (via drill 0.9)
  other vias: 46.99,73.66
N$533  (via drill 0.9)
  other vias: 44.45,76.2
N$534  (via drill 0.9)
  other vias: 46.99,76.2
N$535  (via drill 0.9)
  other vias: 44.45,78.74
N$536  (via drill 0.9)
  other vias: 46.99,78.74
N$537  (via drill 0.9)
  other vias: 44.45,81.28
N$538  (via drill 0.9)
  other vias: 46.99,81.28
N$539  (via drill 0.9)
  other vias: 44.45,83.82
N$540  (via drill 0.9)
  other vias: 46.99,83.82
N$541  (via drill 0.9)
  other vias: 44.45,25.4
N$542  (via drill 0.9)
  other vias: 46.99,25.4
N$543  (via drill 0.9)
  other vias: 46.99,27.94
N$544  (via drill 0.9)
  other vias: 44.45,27.94
N$545  (via drill 0.9)
  other vias: 44.45,30.48
N$546  (via drill 0.9)
  other vias: 46.99,30.48
N$547  (via drill 0.9)
  other vias: 44.45,33.02
N$548  (via drill 0.9)
  other vias: 46.99,33.02
N$549  (via drill 0.9)
  other vias: 44.45,35.56
N$550  (via drill 0.9)
  other vias: 46.99,35.56
N$551  (via drill 0.9)
  other vias: 44.45,38.1
N$552  (via drill 0.9)
  other vias: 46.99,38.1
N$553  (via drill 0.9)
  other vias: 44.45,40.64
N$554  (via drill 0.9)
  other vias: 46.99,40.64
N$555  (via drill 0.9)
  other vias: 44.45,43.18
N$556  (via drill 0.9)
  other vias: 53.34,63.5
N$557  (via drill 0.9)
  other vias: 44.45,45.72
N$558  (via drill 0.9)
  other vias: 46.99,45.72
N$559  (via drill 0.9)
  other vias: 44.45,48.26
N$560  (via drill 0.9)
  other vias: 46.99,48.26
N$561  (via drill 0.9)
  other vias: 44.45,50.8
N$562  (via drill 0.9)
  other vias: 46.99,50.8
N$563  (via drill 0.9)
  other vias: 44.45,53.34
N$564  (via drill 0.9)
  other vias: 46.99,53.34
N$565  (via drill 0.9)
  other vias: 44.45,2.54
N$566  (via drill 0.9)
  other vias: 46.99,2.54
N$567  (via drill 0.9)
  other vias: 44.45,5.08
N$568  (via drill 0.9)
  other vias: 46.99,5.08
N$569  (via drill 0.9)
  other vias: 44.45,7.62
N$570  (via drill 0.9)
  other vias: 46.99,7.62
N$571  (via drill 0.9)
  other vias: 44.45,10.16
N$572  (via drill 0.9)
  other vias: 46.99,10.16
N$573  (via drill 0.9)
  other vias: 44.45,12.7
N$574  (via drill 0.9)
  other vias: 46.99,12.7
N$575  (via drill 0.9)
  other vias: 44.45,15.24
N$576  (via drill 0.9)
  other vias: 46.99,15.24
N$577  (via drill 0.9)
  other vias: 44.45,17.78
N$578  (via drill 0.9)
  other vias: 46.99,17.78
N$579  (via drill 0.9)
  other vias: 44.45,20.32
N$580  (via drill 0.9)
  other vias: 46.99,20.32
N$581  (via drill 0.9)
  other vias: 44.45,22.86
N$582  (via drill 0.9)
  other vias: 46.99,22.86
N$583  (via drill 0.9)
  other vias: 55.88,63.5
N$584  (via drill 0.9)
  other vias: 53.34,66.04
N$585  (via drill 0.9)
  other vias: 55.88,66.04
N$586  (via drill 0.9)
  other vias: 53.34,68.58
N$587  (via drill 0.9)
  other vias: 55.88,68.58
N$588  (via drill 0.9)
  other vias: 53.34,71.12
N$589  (via drill 0.9)
  other vias: 55.88,71.12
N$590  (via drill 0.9)
  other vias: 53.34,73.66
N$591  (via drill 0.9)
  other vias: 55.88,73.66
N$592  (via drill 0.9)
  other vias: 53.34,76.2
N$593  (via drill 0.9)
  other vias: 55.88,76.2
N$594  (via drill 0.9)
  other vias: 53.34,78.74
N$595  (via drill 0.9)
  other vias: 55.88,78.74
N$596  (via drill 0.9)
  other vias: 53.34,81.28
N$597  (via drill 0.9)
  other vias: 55.88,81.28
N$598  (via drill 0.9)
  other vias: 53.34,83.82
N$599  (via drill 0.9)
  other vias: 55.88,83.82
N$600  (via drill 0.9)
  other vias: 53.34,2.54
N$601  (via drill 0.9)
  other vias: 55.88,2.54
N$602  (via drill 0.9)
  other vias: 55.88,5.08
N$603  (via drill 0.9)
  other vias: 53.34,5.08
N$604  (via drill 0.9)
  other vias: 53.34,7.62
N$605  (via drill 0.9)
  other vias: 55.88,7.62
N$606  (via drill 0.9)
  other vias: 53.34,10.16
N$607  (via drill 0.9)
  other vias: 55.88,10.16
N$608  (via drill 0.9)
  other vias: 53.34,12.7
N$609  (via drill 0.9)
  other vias: 55.88,12.7
N$610  (via drill 0.9)
  other vias: 53.34,15.24
N$611  (via drill 0.9)
  other vias: 55.88,15.24
N$612  (via drill 0.9)
  other vias: 53.34,17.78
N$613  (via drill 0.9)
  other vias: 55.88,17.78
N$614  (via drill 0.9)
  other vias: 53.34,20.32
N$615  (via drill 0.9)
  other vias: 55.88,20.32
N$616  (via drill 0.9)
  other vias: 53.34,22.86
N$617  (via drill 0.9)
  other vias: 55.88,22.86
N$618  (via drill 0.9)
  other vias: 53.34,25.4
N$619  (via drill 0.9)
  other vias: 55.88,25.4
N$620  (via drill 0.9)
  other vias: 53.34,27.94
N$621  (via drill 0.9)
  other vias: 55.88,27.94
N$622  (via drill 0.9)
  other vias: 53.34,30.48
N$623  (via drill 0.9)
  other vias: 55.88,30.48
N$624  (via drill 0.9)
  other vias: 58.42,55.88
N$625  (via drill 0.9)
  other vias: 60.96,55.88
N$626  (via drill 0.9)
  other vias: 60.96,58.42
N$627  (via drill 0.9)
  other vias: 58.42,58.42
N$628  (via drill 0.9)
  other vias: 58.42,60.96
N$629  (via drill 0.9)
  other vias: 60.96,60.96
N$630  (via drill 0.9)
  other vias: 58.42,63.5
N$631  (via drill 0.9)
  other vias: 60.96,63.5
N$632  (via drill 0.9)
  other vias: 58.42,66.04
N$633  (via drill 0.9)
  other vias: 60.96,66.04
N$634  (via drill 0.9)
  other vias: 58.42,68.58
N$635  (via drill 0.9)
  other vias: 60.96,68.58
N$636  (via drill 0.9)
  other vias: 58.42,71.12
N$637  (via drill 0.9)
  other vias: 60.96,71.12
N$638  (via drill 0.9)
  other vias: 58.42,73.66
N$639  (via drill 0.9)
  other vias: 60.96,73.66
N$640  (via drill 0.9)
  other vias: 58.42,76.2
N$641  (via drill 0.9)
  other vias: 60.96,76.2
N$642  (via drill 0.9)
  other vias: 58.42,78.74
N$643  (via drill 0.9)
  other vias: 60.96,78.74
N$644  (via drill 0.9)
  other vias: 58.42,81.28
N$645  (via drill 0.9)
  other vias: 60.96,81.28
N$646  (via drill 0.9)
  other vias: 58.42,83.82
N$647  (via drill 0.9)
  other vias: 60.96,83.82
N$648  (via drill 0.9)
  other vias: 58.42,25.4
N$649  (via drill 0.9)
  other vias: 60.96,25.4
N$650  (via drill 0.9)
  other vias: 60.96,27.94
N$651  (via drill 0.9)
  other vias: 58.42,27.94
N$652  (via drill 0.9)
  other vias: 58.42,30.48
N$653  (via drill 0.9)
  other vias: 60.96,30.48
N$654  (via drill 0.9)
  other vias: 58.42,33.02
N$655  (via drill 0.9)
  other vias: 60.96,33.02
N$656  (via drill 0.9)
  other vias: 58.42,35.56
N$657  (via drill 0.9)
  other vias: 60.96,35.56
N$658  (via drill 0.9)
  other vias: 58.42,38.1
N$659  (via drill 0.9)
  other vias: 60.96,38.1
N$660  (via drill 0.9)
  other vias: 58.42,40.64
N$661  (via drill 0.9)
  other vias: 60.96,40.64
N$662  (via drill 0.9)
  other vias: 58.42,43.18
N$663  (via drill 0.9)
  other vias: 60.96,43.18
N$664  (via drill 0.9)
  other vias: 58.42,45.72
N$665  (via drill 0.9)
  other vias: 60.96,45.72
N$666  (via drill 0.9)
  other vias: 58.42,48.26
N$667  (via drill 0.9)
  other vias: 60.96,48.26
N$668  (via drill 0.9)
  other vias: 58.42,50.8
N$669  (via drill 0.9)
  other vias: 60.96,50.8
N$670  (via drill 0.9)
  other vias: 58.42,53.34
N$671  (via drill 0.9)
  other vias: 60.96,53.34
N$672  (via drill 0.9)
  other vias: 58.42,2.54
N$673  (via drill 0.9)
  other vias: 60.96,2.54
N$674  (via drill 0.9)
  other vias: 58.42,5.08
N$675  (via drill 0.9)
  other vias: 60.96,5.08
N$676  (via drill 0.9)
  other vias: 58.42,7.62
N$677  (via drill 0.9)
  other vias: 60.96,7.62
N$678  (via drill 0.9)
  other vias: 58.42,10.16
N$679  (via drill 0.9)
  other vias: 60.96,10.16
N$680  (via drill 0.9)
  other vias: 58.42,12.7
N$681  (via drill 0.9)
  other vias: 60.96,12.7
N$682  (via drill 0.9)
  other vias: 58.42,15.24
N$683  (via drill 0.9)
  other vias: 60.96,15.24
N$684  (via drill 0.9)
  other vias: 58.42,17.78
N$685  (via drill 0.9)
  other vias: 60.96,17.78
N$686  (via drill 0.9)
  other vias: 58.42,20.32
N$687  (via drill 0.9)
  other vias: 60.96,20.32
N$688  (via drill 0.9)
  other vias: 58.42,22.86
N$689  (via drill 0.9)
  other vias: 60.96,22.86
N$690  (via drill 0.9)
  other vias: 63.5,55.88
N$691  (via drill 0.9)
  other vias: 66.04,55.88
N$692  (via drill 0.9)
  other vias: 66.04,58.42
N$693  (via drill 0.9)
  other vias: 63.5,58.42
N$694  (via drill 0.9)
  other vias: 63.5,60.96
N$695  (via drill 0.9)
  other vias: 66.04,60.96
N$696  (via drill 0.9)
  other vias: 63.5,63.5
N$697  (via drill 0.9)
  other vias: 66.04,63.5
N$698  (via drill 0.9)
  other vias: 63.5,66.04
N$699  (via drill 0.9)
  other vias: 66.04,66.04
N$700  (via drill 0.9)
  other vias: 63.5,68.58
N$701  (via drill 0.9)
  other vias: 66.04,68.58
N$702  (via drill 0.9)
  other vias: 63.5,71.12
N$703  (via drill 0.9)
  other vias: 66.04,71.12
N$704  (via drill 0.9)
  other vias: 63.5,73.66
N$705  (via drill 0.9)
  other vias: 66.04,73.66
N$706  (via drill 0.9)
  other vias: 63.5,76.2
N$707  (via drill 0.9)
  other vias: 66.04,76.2
N$708  (via drill 0.9)
  other vias: 63.5,78.74
N$709  (via drill 0.9)
  other vias: 66.04,78.74
N$710  (via drill 0.9)
  other vias: 63.5,81.28
N$711  (via drill 0.9)
  other vias: 66.04,81.28
N$712  (via drill 0.9)
  other vias: 63.5,83.82
N$713  (via drill 0.9)
  other vias: 66.04,83.82
N$714  (via drill 0.9)
  other vias: 63.5,25.4
N$715  (via drill 0.9)
  other vias: 66.04,25.4
N$716  (via drill 0.9)
  other vias: 66.04,27.94
N$717  (via drill 0.9)
  other vias: 63.5,27.94
N$718  (via drill 0.9)
  other vias: 63.5,30.48
N$719  (via drill 0.9)
  other vias: 66.04,30.48
N$720  (via drill 0.9)
  other vias: 63.5,33.02
N$721  (via drill 0.9)
  other vias: 66.04,33.02
N$722  (via drill 0.9)
  other vias: 63.5,35.56
N$723  (via drill 0.9)
  other vias: 66.04,35.56
N$724  (via drill 0.9)
  other vias: 63.5,38.1
N$725  (via drill 0.9)
  other vias: 66.04,38.1
N$726  (via drill 0.9)
  other vias: 63.5,40.64
N$727  (via drill 0.9)
  other vias: 66.04,40.64
N$728  (via drill 0.9)
  other vias: 63.5,43.18
N$729  (via drill 0.9)
  other vias: 66.04,43.18
N$730  (via drill 0.9)
  other vias: 63.5,45.72
N$731  (via drill 0.9)
  other vias: 66.04,45.72
N$732  (via drill 0.9)
  other vias: 63.5,48.26
N$733  (via drill 0.9)
  other vias: 66.04,48.26
N$734  (via drill 0.9)
  other vias: 63.5,50.8
N$735  (via drill 0.9)
  other vias: 66.04,50.8
N$736  (via drill 0.9)
  other vias: 63.5,53.34
N$737  (via drill 0.9)
  other vias: 66.04,53.34
N$738  (via drill 0.9)
  other vias: 63.5,2.54
N$739  (via drill 0.9)
  other vias: 66.04,2.54
N$740  (via drill 0.9)
  other vias: 63.5,5.08
N$741  (via drill 0.9)
  other vias: 66.04,5.08
N$742  (via drill 0.9)
  other vias: 63.5,7.62
N$743  (via drill 0.9)
  other vias: 66.04,7.62
N$744  (via drill 0.9)
  other vias: 63.5,10.16
N$745  (via drill 0.9)
  other vias: 66.04,10.16
N$746  (via drill 0.9)
  other vias: 63.5,12.7
N$747  (via drill 0.9)
  other vias: 66.04,12.7
N$748  (via drill 0.9)
  other vias: 63.5,15.24
N$749  (via drill 0.9)
  other vias: 66.04,15.24
N$750  (via drill 0.9)
  other vias: 63.5,17.78
N$751  (via drill 0.9)
  other vias: 66.04,17.78
N$752  (via drill 0.9)
  other vias: 63.5,20.32
N$753  (via drill 0.9)
  other vias: 66.04,20.32
N$754  (via drill 0.9)
  other vias: 63.5,22.86
N$755  (via drill 0.9)
  other vias: 66.04,22.86
N$756  (via drill 0.9)
  other vias: 68.58,55.88
N$757  (via drill 0.9)
  other vias: 71.12,55.88
N$758  (via drill 0.9)
  other vias: 71.12,58.42
N$759  (via drill 0.9)
  other vias: 68.58,58.42
N$760  (via drill 0.9)
  other vias: 68.58,60.96
N$761  (via drill 0.9)
  other vias: 71.12,60.96
N$762  (via drill 0.9)
  other vias: 68.58,63.5
N$763  (via drill 0.9)
  other vias: 71.12,63.5
N$764  (via drill 0.9)
  other vias: 68.58,66.04
N$765  (via drill 0.9)
  other vias: 71.12,66.04
N$766  (via drill 0.9)
  other vias: 68.58,68.58
N$767  (via drill 0.9)
  other vias: 71.12,68.58
N$768  (via drill 0.9)
  other vias: 68.58,71.12
N$769  (via drill 0.9)
  other vias: 71.12,71.12
N$770  (via drill 0.9)
  other vias: 68.58,73.66
N$771  (via drill 0.9)
  other vias: 71.12,73.66
N$772  (via drill 0.9)
  other vias: 68.58,76.2
N$773  (via drill 0.9)
  other vias: 71.12,76.2
N$774  (via drill 0.9)
  other vias: 68.58,78.74
N$775  (via drill 0.9)
  other vias: 71.12,78.74
N$776  (via drill 0.9)
  other vias: 68.58,81.28
N$777  (via drill 0.9)
  other vias: 71.12,81.28
N$778  (via drill 0.9)
  other vias: 68.58,83.82
N$779  (via drill 0.9)
  other vias: 71.12,83.82
N$780  (via drill 0.9)
  other vias: 68.58,25.4
N$781  (via drill 0.9)
  other vias: 71.12,25.4
N$782  (via drill 0.9)
  other vias: 71.12,27.94
N$783  (via drill 0.9)
  other vias: 68.58,27.94
N$784  (via drill 0.9)
  other vias: 68.58,30.48
N$785  (via drill 0.9)
  other vias: 71.12,30.48
N$786  (via drill 0.9)
  other vias: 68.58,33.02
N$787  (via drill 0.9)
  other vias: 71.12,33.02
N$788  (via drill 0.9)
  other vias: 68.58,35.56
N$789  (via drill 0.9)
  other vias: 71.12,35.56
N$790  (via drill 0.9)
  other vias: 68.58,38.1
N$791  (via drill 0.9)
  other vias: 71.12,38.1
N$792  (via drill 0.9)
  other vias: 68.58,40.64
N$793  (via drill 0.9)
  other vias: 71.12,40.64
N$794  (via drill 0.9)
  other vias: 68.58,43.18
N$795  (via drill 0.9)
  other vias: 71.12,43.18
N$796  (via drill 0.9)
  other vias: 68.58,45.72
N$797  (via drill 0.9)
  other vias: 71.12,45.72
N$798  (via drill 0.9)
  other vias: 68.58,48.26
N$799  (via drill 0.9)
  other vias: 71.12,48.26
N$800  (via drill 0.9)
  other vias: 68.58,50.8
N$801  (via drill 0.9)
  other vias: 71.12,50.8
N$802  (via drill 0.9)
  other vias: 68.58,53.34
N$803  (via drill 0.9)
  other vias: 71.12,53.34
N$804  (via drill 0.9)
  other vias: 68.58,2.54
N$805  (via drill 0.9)
  other vias: 71.12,2.54
N$806  (via drill 0.9)
  other vias: 68.58,5.08
N$807  (via drill 0.9)
  other vias: 71.12,5.08
N$808  (via drill 0.9)
  other vias: 68.58,7.62
N$809  (via drill 0.9)
  other vias: 71.12,7.62
N$810  (via drill 0.9)
  other vias: 68.58,10.16
N$811  (via drill 0.9)
  other vias: 71.12,10.16
N$812  (via drill 0.9)
  other vias: 68.58,12.7
N$813  (via drill 0.9)
  other vias: 71.12,12.7
N$814  (via drill 0.9)
  other vias: 68.58,15.24
N$815  (via drill 0.9)
  other vias: 71.12,15.24
N$816  (via drill 0.9)
  other vias: 68.58,17.78
N$817  (via drill 0.9)
  other vias: 71.12,17.78
N$818  (via drill 0.9)
  other vias: 68.58,20.32
N$819  (via drill 0.9)
  other vias: 71.12,20.32
N$820  (via drill 0.9)
  other vias: 68.58,22.86
N$821  (via drill 0.9)
  other vias: 71.12,22.86
N$822  (via drill 0.9)
  other vias: 73.66,55.88
N$823  (via drill 0.9)
  other vias: 76.2,55.88
N$824  (via drill 0.9)
  other vias: 76.2,58.42
N$825  (via drill 0.9)
  other vias: 73.66,58.42
N$826  (via drill 0.9)
  other vias: 73.66,60.96
N$827  (via drill 0.9)
  other vias: 76.2,60.96
N$828  (via drill 0.9)
  other vias: 73.66,63.5
N$829  (via drill 0.9)
  other vias: 76.2,63.5
N$830  (via drill 0.9)
  other vias: 73.66,66.04
N$831  (via drill 0.9)
  other vias: 76.2,66.04
N$832  (via drill 0.9)
  other vias: 73.66,68.58
N$833  (via drill 0.9)
  other vias: 76.2,68.58
N$834  (via drill 0.9)
  other vias: 73.66,71.12
N$835  (via drill 0.9)
  other vias: 76.2,71.12
N$836  (via drill 0.9)
  other vias: 73.66,73.66
N$837  (via drill 0.9)
  other vias: 76.2,73.66
N$838  (via drill 0.9)
  other vias: 73.66,76.2
N$839  (via drill 0.9)
  other vias: 76.2,76.2
N$840  (via drill 0.9)
  other vias: 73.66,78.74
N$841  (via drill 0.9)
  other vias: 76.2,78.74
N$842  (via drill 0.9)
  other vias: 73.66,81.28
N$843  (via drill 0.9)
  other vias: 76.2,81.28
N$844  (via drill 0.9)
  other vias: 73.66,83.82
N$845  (via drill 0.9)
  other vias: 76.2,83.82
N$846  (via drill 0.9)
  other vias: 73.66,25.4
N$847  (via drill 0.9)
  other vias: 76.2,25.4
N$848  (via drill 0.9)
  other vias: 76.2,27.94
N$849  (via drill 0.9)
  other vias: 73.66,27.94
N$850  (via drill 0.9)
  other vias: 73.66,30.48
N$851  (via drill 0.9)
  other vias: 76.2,30.48
N$852  (via drill 0.9)
  other vias: 73.66,33.02
N$853  (via drill 0.9)
  other vias: 76.2,33.02
N$854  (via drill 0.9)
  other vias: 73.66,35.56
N$855  (via drill 0.9)
  other vias: 76.2,35.56
N$856  (via drill 0.9)
  other vias: 73.66,38.1
N$857  (via drill 0.9)
  other vias: 76.2,38.1
N$858  (via drill 0.9)
  other vias: 73.66,40.64
N$859  (via drill 0.9)
  other vias: 76.2,40.64
N$860  (via drill 0.9)
  other vias: 73.66,43.18
N$861  (via drill 0.9)
  other vias: 76.2,43.18
N$862  (via drill 0.9)
  other vias: 73.66,45.72
N$863  (via drill 0.9)
  other vias: 76.2,45.72
N$864  (via drill 0.9)
  other vias: 73.66,48.26
N$865  (via drill 0.9)
  other vias: 76.2,48.26
N$866  (via drill 0.9)
  other vias: 73.66,50.8
N$867  (via drill 0.9)
  other vias: 76.2,50.8
N$868  (via drill 0.9)
  other vias: 73.66,53.34
N$869  (via drill 0.9)
  other vias: 76.2,53.34
N$870  (via drill 0.9)
  other vias: 73.66,2.54
N$871  (via drill 0.9)
  other vias: 76.2,2.54
N$872  (via drill 0.9)
  other vias: 73.66,5.08
N$873  (via drill 0.9)
  other vias: 76.2,5.08
N$874  (via drill 0.9)
  other vias: 73.66,7.62
N$875  (via drill 0.9)
  other vias: 76.2,7.62
N$876  (via drill 0.9)
  other vias: 73.66,10.16
N$877  (via drill 0.9)
  other vias: 76.2,10.16
N$878  (via drill 0.9)
  other vias: 73.66,12.7
N$879  (via drill 0.9)
  other vias: 76.2,12.7
N$880  (via drill 0.9)
  other vias: 73.66,15.24
N$881  (via drill 0.9)
  other vias: 76.2,15.24
N$882  (via drill 0.9)
  other vias: 73.66,17.78
N$883  (via drill 0.9)
  other vias: 76.2,17.78
N$884  (via drill 0.9)
  other vias: 73.66,20.32
N$885  (via drill 0.9)
  other vias: 76.2,20.32
N$886  (via drill 0.9)
  other vias: 73.66,22.86
N$887  (via drill 0.9)
  other vias: 76.2,22.86
N$888  (via drill 0.9)
  other vias: 78.74,55.88
N$889  (via drill 0.9)
  other vias: 81.28,55.88
N$890  (via drill 0.9)
  other vias: 81.28,58.42
N$891  (via drill 0.9)
  other vias: 78.74,58.42
N$892  (via drill 0.9)
  other vias: 78.74,60.96
N$893  (via drill 0.9)
  other vias: 81.28,60.96
N$894  (via drill 0.9)
  other vias: 78.74,63.5
N$895  (via drill 0.9)
  other vias: 81.28,63.5
N$896  (via drill 0.9)
  other vias: 78.74,66.04
N$897  (via drill 0.9)
  other vias: 81.28,66.04
N$898  (via drill 0.9)
  other vias: 78.74,68.58
N$899  (via drill 0.9)
  other vias: 81.28,68.58
N$900  (via drill 0.9)
  other vias: 78.74,71.12
N$901  (via drill 0.9)
  other vias: 81.28,71.12
N$902  (via drill 0.9)
  other vias: 78.74,73.66
N$903  (via drill 0.9)
  other vias: 81.28,73.66
N$904  (via drill 0.9)
  other vias: 78.74,76.2
N$905  (via drill 0.9)
  other vias: 81.28,76.2
N$906  (via drill 0.9)
  other vias: 78.74,78.74
N$907  (via drill 0.9)
  other vias: 81.28,78.74
N$908  (via drill 0.9)
  other vias: 78.74,81.28
N$909  (via drill 0.9)
  other vias: 81.28,81.28
N$910  (via drill 0.9)
  other vias: 78.74,83.82
N$911  (via drill 0.9)
  other vias: 81.28,83.82
N$912  (via drill 0.9)
  other vias: 78.74,25.4
N$913  (via drill 0.9)
  other vias: 81.28,25.4
N$914  (via drill 0.9)
  other vias: 81.28,27.94
N$915  (via drill 0.9)
  other vias: 78.74,27.94
N$916  (via drill 0.9)
  other vias: 78.74,30.48
N$917  (via drill 0.9)
  other vias: 81.28,30.48
N$918  (via drill 0.9)
  other vias: 78.74,33.02
N$919  (via drill 0.9)
  other vias: 81.28,33.02
N$920  (via drill 0.9)
  other vias: 78.74,35.56
N$921  (via drill 0.9)
  other vias: 81.28,35.56
N$922  (via drill 0.9)
  other vias: 78.74,38.1
N$923  (via drill 0.9)
  other vias: 81.28,38.1
N$924  (via drill 0.9)
  other vias: 78.74,40.64
N$925  (via drill 0.9)
  other vias: 81.28,40.64
N$926  (via drill 0.9)
  other vias: 78.74,43.18
N$927  (via drill 0.9)
  other vias: 81.28,43.18
N$928  (via drill 0.9)
  other vias: 78.74,45.72
N$929  (via drill 0.9)
  other vias: 81.28,45.72
N$930  (via drill 0.9)
  other vias: 78.74,48.26
N$931  (via drill 0.9)
  other vias: 81.28,48.26
N$932  (via drill 0.9)
  other vias: 78.74,50.8
N$933  (via drill 0.9)
  other vias: 81.28,50.8
N$934  (via drill 0.9)
  other vias: 78.74,53.34
N$935  (via drill 0.9)
  other vias: 81.28,53.34
N$936  (via drill 0.9)
  other vias: 78.74,2.54
N$937  (via drill 0.9)
  other vias: 81.28,2.54
N$938  (via drill 0.9)
  other vias: 78.74,5.08
N$939  (via drill 0.9)
  other vias: 81.28,5.08
N$940  (via drill 0.9)
  other vias: 78.74,7.62
N$941  (via drill 0.9)
  other vias: 81.28,7.62
N$942  (via drill 0.9)
  other vias: 78.74,10.16
N$943  (via drill 0.9)
  other vias: 81.28,10.16
N$944  (via drill 0.9)
  other vias: 78.74,12.7
N$945  (via drill 0.9)
  other vias: 81.28,12.7
N$946  (via drill 0.9)
  other vias: 78.74,15.24
N$947  (via drill 0.9)
  other vias: 81.28,15.24
N$948  (via drill 0.9)
  other vias: 78.74,17.78
N$949  (via drill 0.9)
  other vias: 81.28,17.78
N$950  (via drill 0.9)
  other vias: 78.74,20.32
N$951  (via drill 0.9)
  other vias: 81.28,20.32
N$952  (via drill 0.9)
  other vias: 78.74,22.86
N$953  (via drill 0.9)
  other vias: 81.28,22.86
N$954  (via drill 0.9)
  other vias: 83.82,55.88
N$955  (via drill 0.9)
  other vias: 86.36,55.88
N$956  (via drill 0.9)
  other vias: 86.36,58.42
N$957  (via drill 0.9)
  other vias: 83.82,58.42
N$958  (via drill 0.9)
  other vias: 83.82,60.96
N$959  (via drill 0.9)
  other vias: 86.36,60.96
N$960  (via drill 0.9)
  other vias: 83.82,63.5
N$961  (via drill 0.9)
  other vias: 86.36,63.5
N$962  (via drill 0.9)
  other vias: 83.82,66.04
N$963  (via drill 0.9)
  other vias: 86.36,66.04
N$964  (via drill 0.9)
  other vias: 83.82,68.58
N$965  (via drill 0.9)
  other vias: 86.36,68.58
N$966  (via drill 0.9)
  other vias: 83.82,71.12
N$967  (via drill 0.9)
  other vias: 86.36,71.12
N$968  (via drill 0.9)
  other vias: 83.82,73.66
N$969  (via drill 0.9)
  other vias: 86.36,73.66
N$970  (via drill 0.9)
  other vias: 83.82,76.2
N$971  (via drill 0.9)
  other vias: 86.36,76.2
N$972  (via drill 0.9)
  other vias: 83.82,78.74
N$973  (via drill 0.9)
  other vias: 86.36,78.74
N$974  (via drill 0.9)
  other vias: 83.82,81.28
N$975  (via drill 0.9)
  other vias: 86.36,81.28
N$976  (via drill 0.9)
  other vias: 83.82,83.82
N$977  (via drill 0.9)
  other vias: 86.36,83.82
N$978  (via drill 0.9)
  other vias: 83.82,25.4
N$979  (via drill 0.9)
  other vias: 86.36,25.4
N$980  (via drill 0.9)
  other vias: 86.36,27.94
N$981  (via drill 0.9)
  other vias: 83.82,27.94
N$982  (via drill 0.9)
  other vias: 83.82,30.48
N$983  (via drill 0.9)
  other vias: 86.36,30.48
N$984  (via drill 0.9)
  other vias: 83.82,33.02
N$985  (via drill 0.9)
  other vias: 86.36,33.02
N$986  (via drill 0.9)
  other vias: 83.82,35.56
N$987  (via drill 0.9)
  other vias: 86.36,35.56
N$988  (via drill 0.9)
  other vias: 83.82,38.1
N$989  (via drill 0.9)
  other vias: 86.36,38.1
N$990  (via drill 0.9)
  other vias: 83.82,40.64
N$991  (via drill 0.9)
  other vias: 86.36,40.64
N$992  (via drill 0.9)
  other vias: 83.82,43.18
N$993  (via drill 0.9)
  other vias: 86.36,43.18
N$994  (via drill 0.9)
  other vias: 83.82,45.72
N$995  (via drill 0.9)
  other vias: 86.36,45.72
N$996  (via drill 0.9)
  other vias: 83.82,48.26